# Altium PCB PCB.PcbDoc
Units mm, origin at the board's own origin, x right, y up, seen from the top; angles counter-clockwise.
Board outline 110 x 80 mm, 2 copper layers (Top Layer, Bottom Layer), stack 1.671 mm thick; 61 components, 33 nets, 262 pads, 10 vias.
Unrouted connection lines stored in the file: 79.
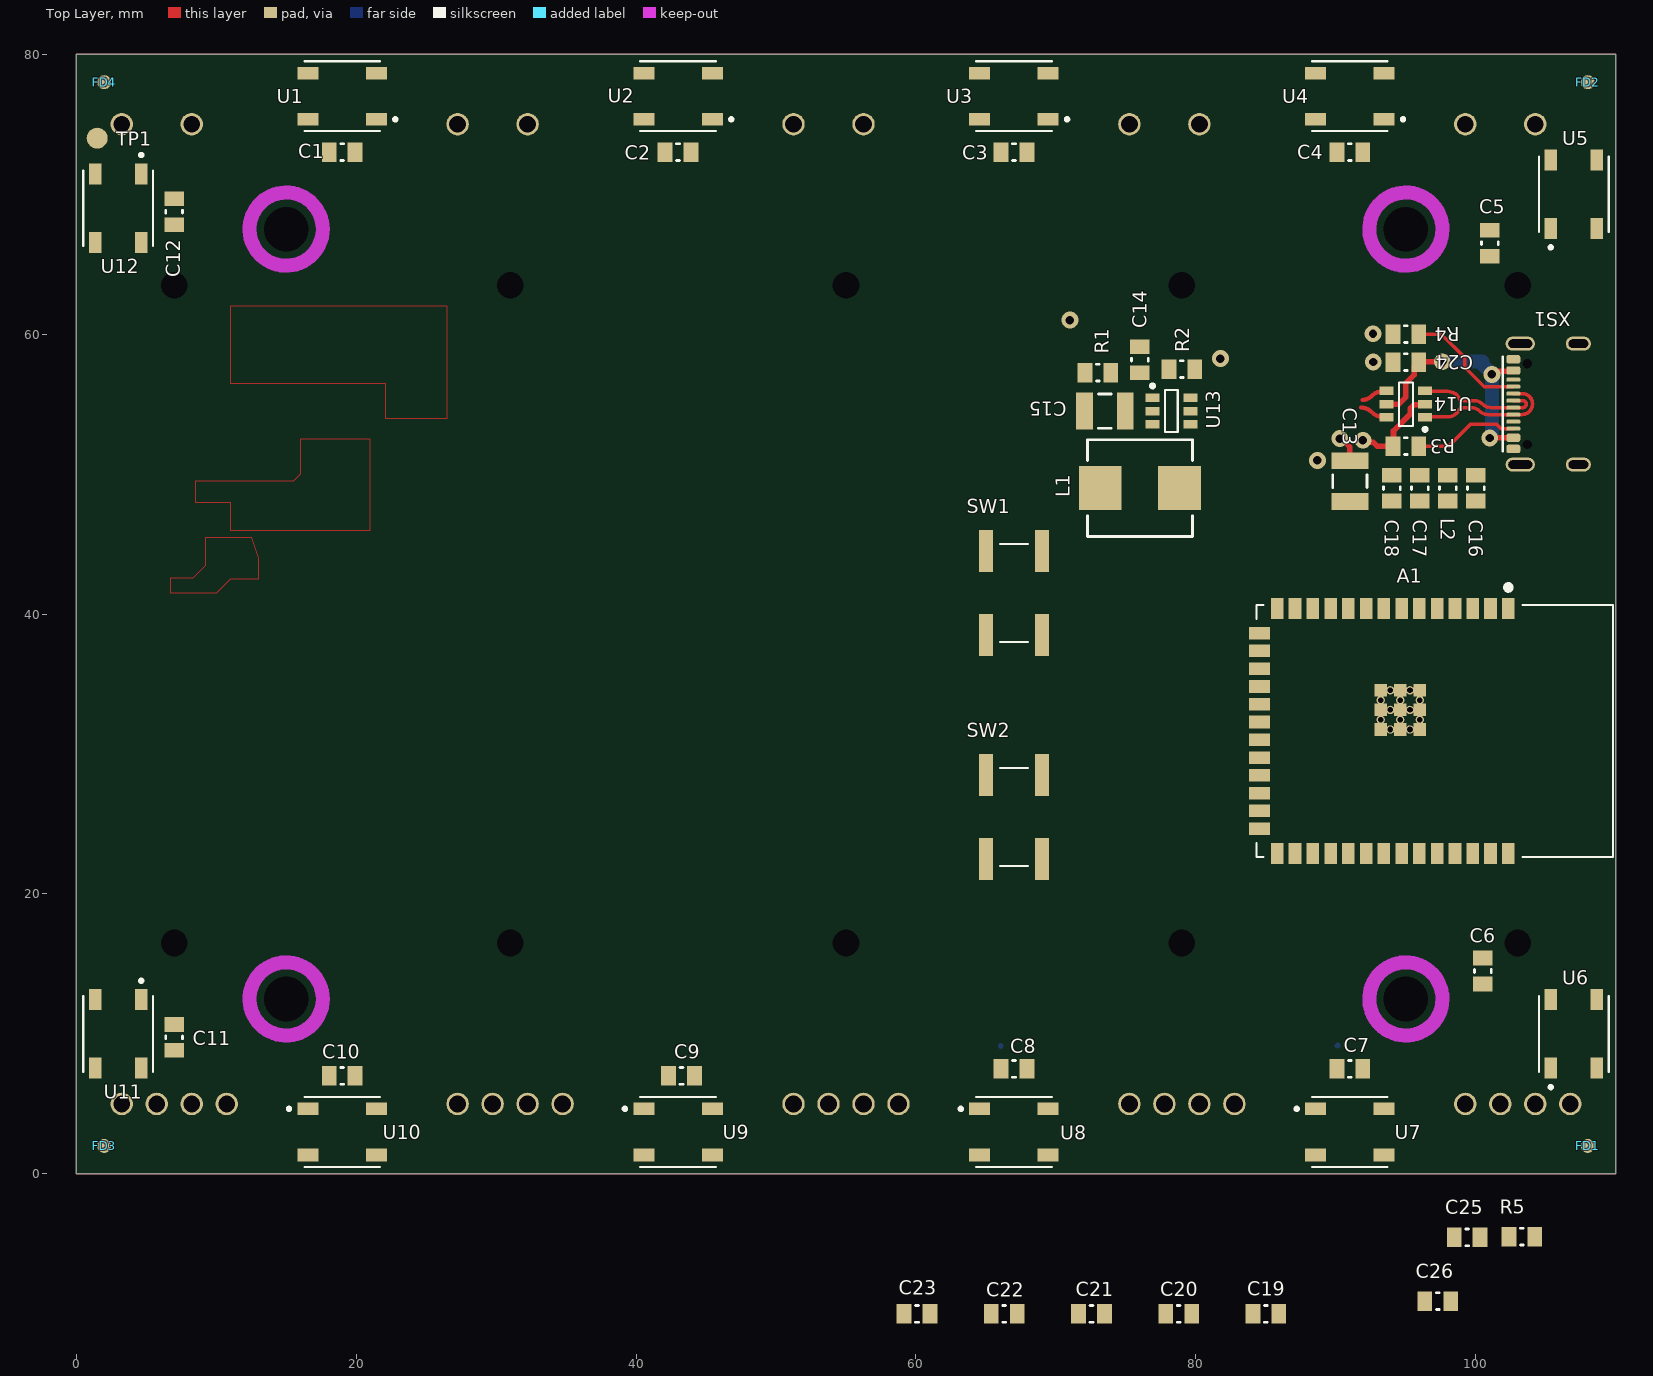
[diagram p0: Top Layer view]
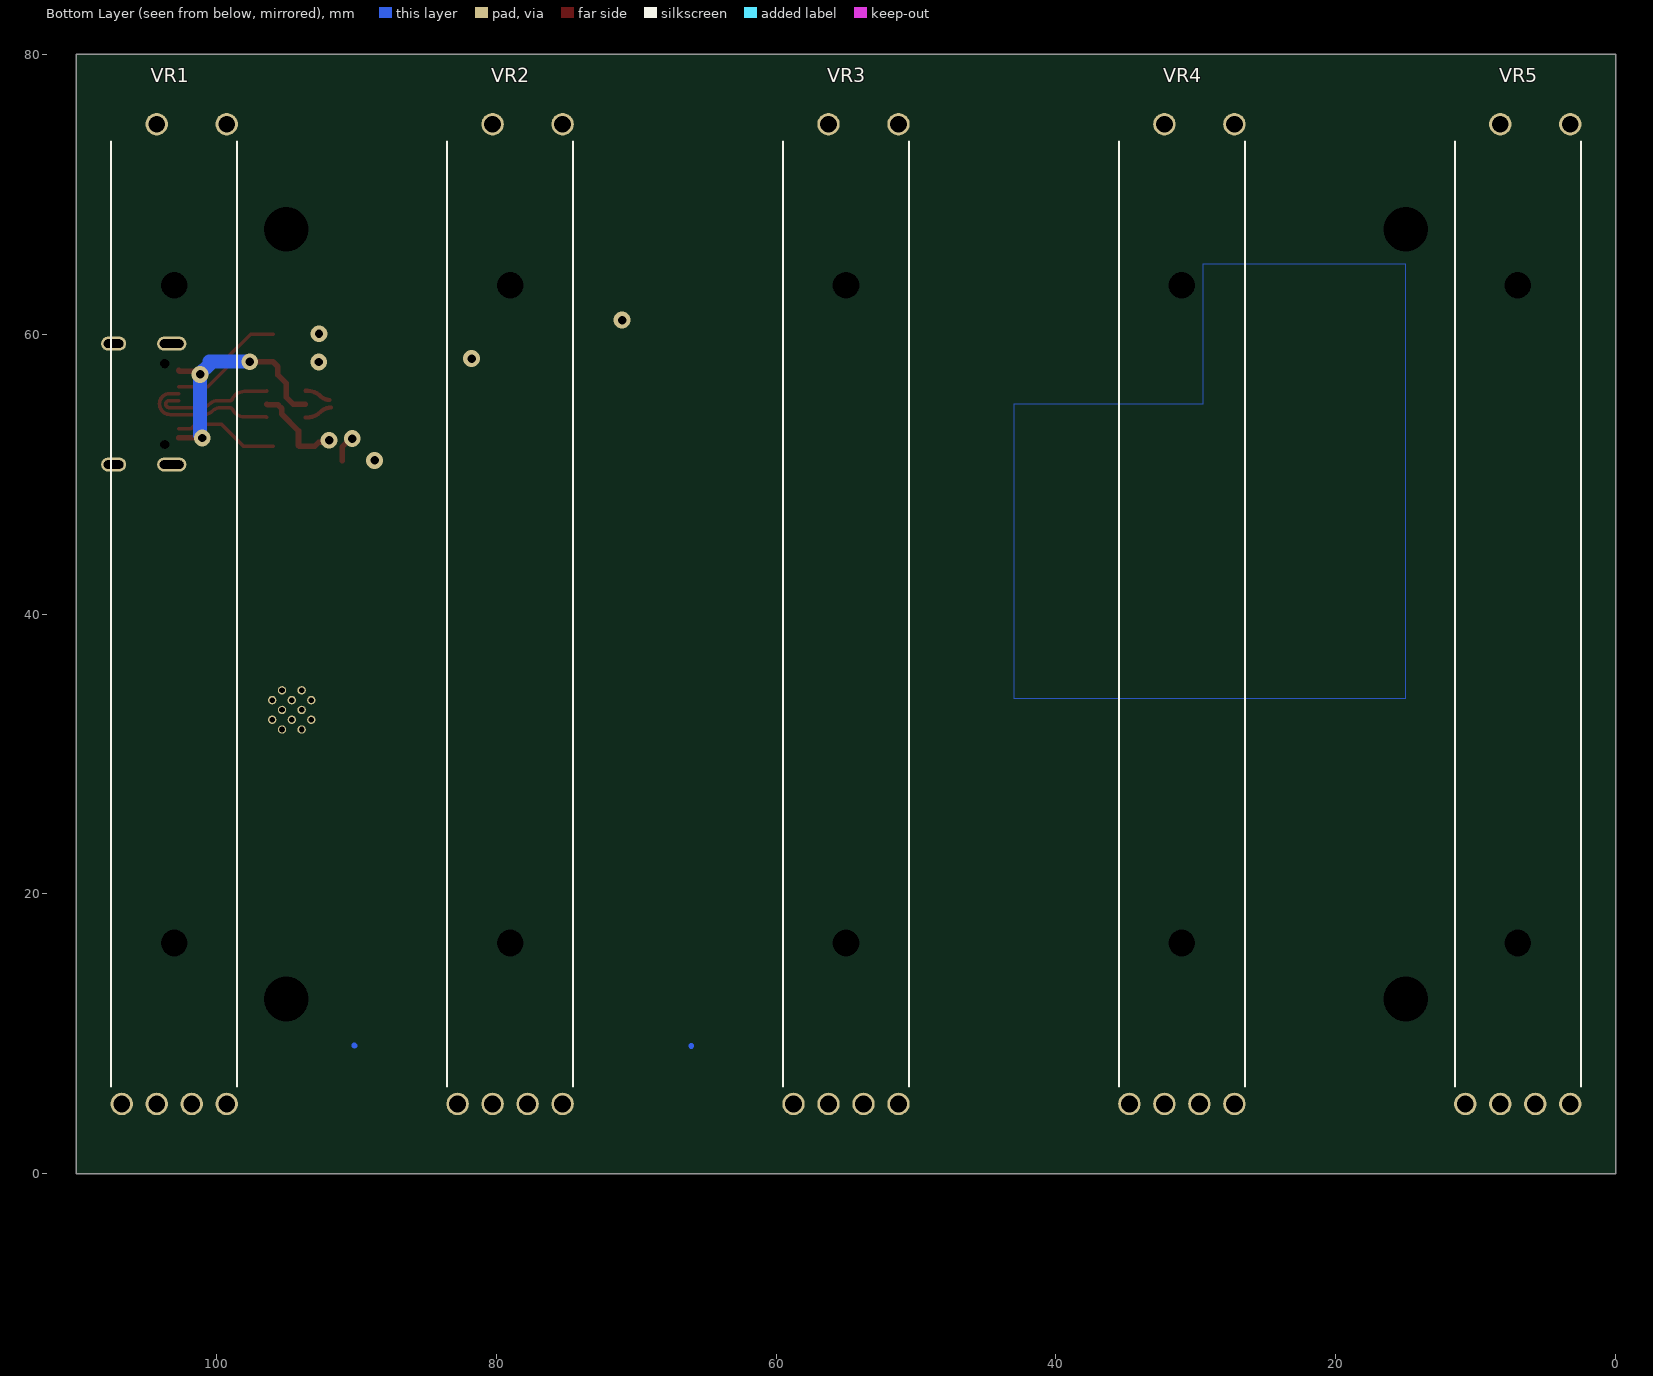
[diagram p1: Bottom Layer view, seen from below]

## Layer stack, top to bottom
Top Solder: solder mask 0.0102, Solder Resist, Dk 3.5
Top Layer: signal copper 0.0356
Dielectric 1: dielectric 1.6, FR-4, Dk 4.8
Bottom Layer: signal copper 0.0356
Bottom Solder: solder mask 0.0102, Solder Resist, Dk 3.5

## Board outline
0,0 0,80 110,80 110,0

## Design rules (kind name [scope] priority, off if disabled: settings)
BoardOutlineClearance [All] p1: gap=0.4 ignorepadtopadclearanceinfootprint=FALSE
Clearance Clearance_USB [(InDifferentialPairClass('All Differential Pairs')) vs InNet('GND')] p1: gap=0.15 ignorepadtopadclearanceinfootprint=FALSE except(0.8: SMDPad-Fill SMDPad-Poly SMDPad-Region; 1: Arc-Fill Arc-Poly Arc-Region Track-Fill Track-Poly Track-Region THPad-Fill THPad-Poly THPad-Region Via-Fill Via-Poly Via-Region Fill-Fill Fill-Poly Fill-Region Fill-Text Poly-Poly Poly-Region Poly-Text Region-Region Region-Text)
Clearance [All] p2: gap=0.15 ignorepadtopadclearanceinfootprint=FALSE except(0: Arc-Hole Track-Hole SMDPad-Hole THPad-Hole Via-Hole Fill-Hole Poly-Hole Region-Hole Text-Hole; 0.4: Arc-Fill Arc-Poly Arc-Region Track-Fill Track-Poly Track-Region SMDPad-Fill SMDPad-Poly SMDPad-Region THPad-Fill THPad-Poly THPad-Region Via-Fill Via-Poly Via-Region Fill-Fill Fill-Poly Fill-Region Poly-Poly Poly-Region Region-Region)
DiffPairsRouting [All] p1: maxlimit=0.3 minlimit=0.15 mostfreqgap=0.25 toplayer_minwidth=0.15 toplayer_maxwidth=0.3 toplayer_prefwidth=0.25 bottomlayer_minwidth=0.15 bottomlayer_maxwidth=0.3 bottomlayer_prefwidth=0.25 maxuncoupledlength=12.7
HoleSize [All] p1: absolutevalues=TRUE maxlimit=3.5 minlimit=0.3 maxpercent=80.000 minpercent=20.000
HoleToHoleClearance [All] p1: gap=0.2 allowstackedmicrovias=TRUE
MinimumSolderMaskSliver [All] p1: minsoldermaskwidth=0.01
PlaneClearance [All] p1: clearance=0.5
PlaneConnect [All] p1: planeconnectstyle=Relief reliefexpansion=0.5 reliefentries=4 reliefconductorwidth=0.25 reliefairgap=0.25
PolygonConnect PolygonConnect_PWR [InNet('GND') or InNet('5V')     or InNet('V_IN')] p1: thpad.connectstyle=Relief thpad.reliefconductorwidth=0.25 thpad.reliefentries=4 thpad.polygonreliefangle="90 Angle" thpad.airgapwidth=0.25 smdpad.connectstyle=Relief smdpad.reliefconductorwidth=0.25 smdpad.reliefentries=4 smdpad.polygonreliefangle="90 Angle" smdpad.airgapwidth=0.25 via.connectstyle=Direct via.reliefconductorwidth=0.254 via.reliefentries=4 via.polygonreliefangle="90 Angle" via.airgapwidth=0.254
PolygonConnect [All] p2: connectstyle=Relief reliefconductorwidth=0.254 reliefentries=4 polygonreliefangle="90 Angle" airgapwidth=0.25
RoutingVias [All] p1: holewidth=0.3 width=1.2 viastyle="Through Hole" minholewidth=0.3 minwidth=1.2 maxholewidth=0.8 maxwidth=2
SilkToSilkClearance [All] p1: silktosilkclearance=0.15
SilkToSolderMaskClearance [IsPad] p1: minsilkscreentomaskgap=0.15 clearancetoexposedcopper=TRUE
SolderMaskExpansion [All] p1: expansion=0.102 istentingtop=FALSE
Width [All] p1: maxlimit=1 minlimit=0.15 preferedwidth=0.25
22 further rules are at their usual default settings.

## Classes and differential pairs
differential pair D1: +D1_P -D1_N
differential pair D: +D_P -D_N

## Components (designator, comment, footprint, x,y, rotation, side; value= is the part's Value field where it differs from the comment)
A1 "ESP32-S3-WROOM-1" ESP32-S3-WROOM-1 102.32,40.4 r270 top
C1 "10n" C0805 19,73 r0 top
C2 "10n" C0805 43,73 r0 top
C3 "10n" C0805 67,73 r0 top
C4 "10n" C0805 91,73 r0 top
C5 "10n" C0805 101,66.5 r270 top
C6 "10n" C0805 100.5,14.5 r270 top
C7 "10n" C0805 91,7.5 r180 top
C8 "10n" C0805 67,7.5 r180 top
C9 "10n" C0805 43.25,7 r180 top
C10 "10n" C0805 19,7 r180 top
C11 "10n" C0805 7,9.75 r90 top
C12 "10n" C0805 7,68.75 r90 top
C13 "22u" C1210 91,49.5 r270 top
C14 "22p" C0805 76,58.175 r90 top
C15 "22u" C1210 73.5,54.5 r180 top
C16 "10n" C0805 100,49 r90 top
C17 "100n" C0805 96,49 r270 top
C18 "4.7u" C0805 94,49 r270 top
C19 "100n" C0805 85,-10 r180 top
C20 "100n" C0805 78.769,-10 r180 top
C21 "100n" C0805 72.537,-10 r180 top
C22 "100n" C0805 66.306,-10 r180 top
C23 "100n" C0805 60.075,-10 r180 top
C24 "100n" C0805 95,58 r0 top
C25 "100n" C0805 99.377,-4.526 r0 top
C26 "100n" C0805 97.285,-9.097 r0 top
FD1 "Fiducial" Fiducial 108,2 r0 top
FD2 "Fiducial" Fiducial 108,78 r0 top
FD3 "Fiducial" Fiducial 2,2 r0 top
FD4 "Fiducial" Fiducial 2,78 r0 top
L1 "4.7u" ASPI-0630LR-4R7 76,49 r180 top
L2 "" C0805 98,49 r270 top
R1 "267k" R0805 73,57.25 r180 top
R2 "59k" R0805 79,57.5 r180 top
R3 "5.1k" R0805 95,52 r0 top
R4 "5.1k" R0805 95,60 r0 top
R5 "10k" R0805 103.289,-4.481 r180 top
SW1 "KSC241JLFS" KSC241JLFS 67,41.5 r90 top
SW2 "KSC241JLFS" KSC241JLFS 67,25.5 r270 top
TP1 "Test Point" Test-Point 1.5,74 r0 top
U1 "WS2812B" WS2812B 19,77 r180 top
U2 "WS2812B" WS2812B 43,77 r180 top
U3 "WS2812B" WS2812B 67,77 r180 top
U4 "WS2812B" WS2812B 91,77 r180 top
U5 "WS2812B" WS2812B 107,70 r90 top
U6 "WS2812B" WS2812B 107,10 r90 top
U7 "WS2812B" WS2812B 91,3 r0 top
U8 "WS2812B" WS2812B 67,3 r0 top
U9 "WS2812B" WS2812B 43,3 r0 top
U10 "WS2812B" WS2812B 19,3 r0 top
U11 "WS2812B" WS2812B 3,10 r270 top
U12 "WS2812B" WS2812B 3,69 r270 top
U13 "MT3420C" SOT23-6-MT3420C 78.25,54.5 r0 top
U14 "USBLC6-2SC6" SOT23-6L-USBLC6-2SC6 95,55 r180 top
VR1 "10k" SC6080GH 103,40 r90 bottom locked
VR2 "10k" SC6080GH 79,40 r90 bottom locked
VR3 "10k" SC6080GH 55,40 r90 bottom locked
VR4 "10k" SC6080GH 31,40 r90 bottom locked
VR5 "10k" SC6080GH 7,40 r90 bottom locked
XS1 "TYPEC-304-ACP16" XUNPU_TYPEC-304-ACP16 105,55 r90 top

## Footprints (in the part's own frame and the unit in brackets; to place one, negate y for a bottom-side part, rotate by r counter-clockwise, add the part's x,y. Pads: shape width x height; smd on the part's side, far side on the other; paste and mask are expansions set on the pad)
ASPI-0630LR-4R7 [mm]
  rect 3.05x3.15 smd: 1(-2.825,0) 2(2.825,0)
  silkscreen extent -3.75,-3.45 3.75,3.45, body extent -3.72,-3.33 3.72,3.32, height 3.1
C0805 [mm] "Chip Capacitor, 2-Leads, Body 2,00x1,25mm, IPC Medium Density"
  rect 1.05x1.4 smd: 1(-0.925,0) 2(0.925,0)
  silkscreen extent -0.1,-0.6 0.1,0.6, body extent -1,-0.63 1,0.63, height 0.6
C1210 [mm] "Chip Capacitor, 2-Leads, Body 3,20x2,50mm, IPC Medium Density"
  rect 1.2x2.65 smd: 1(-1.45,0) 2(1.45,0)
  silkscreen extent -0.45,-1.22 0.45,1.22, body extent -1.6,-1.25 1.6,1.25, height 0.77
ESP32-S3-WROOM-1 [mm]
  rect 1.5x0.9 smd: 1(0,0) 2(0,-1.27) 3(0,-2.54) 4(0,-3.81) 5(0,-5.08) 6(0,-6.35) 7(0,-7.62) 8(0,-8.89) 9(0,-10.16) 10(0,-11.43) 11(0,-12.7) 12(0,-13.97) 13(0,-15.24) 14(0,-16.51) 27(17.5,-16.51) 28(17.5,-15.24) 29(17.5,-13.97) 30(17.5,-12.7) 31(17.5,-11.43) 32(17.5,-10.16) 33(17.5,-8.89) 34(17.5,-7.62) 35(17.5,-6.35) 36(17.5,-5.08) 37(17.5,-3.81) 38(17.5,-2.54) 39(17.5,-1.27) 40(17.5,0)
  rect 0.9x1.5 smd: 15(1.765,-17.76) 16(3.035,-17.76) 17(4.305,-17.76) 18(5.575,-17.76) 19(6.845,-17.76) 20(8.115,-17.76) 21(9.385,-17.76) 22(10.655,-17.76) 23(11.925,-17.76) 24(13.195,-17.76) 25(14.465,-17.76) 26(15.735,-17.76)
  rect 0.9x0.9 smd: 41(5.85,-7.72) 41(5.85,-9.12) 41(5.85,-6.32) 41(7.25,-9.12) 41(7.25,-7.72) 41(7.25,-6.32) 41(8.65,-9.12) 41(8.65,-7.72) 41(8.65,-6.32)
  round 0.6 hole 0.4: 41(5.85,-7.025) 41(5.85,-8.425) 41(6.55,-9.12) 41(6.55,-7.72) 41(6.55,-6.32) 41(7.25,-8.425) 41(7.25,-7.025) 41(7.95,-9.12) 41(7.95,-7.725) 41(7.95,-6.32) 41(8.65,-8.425) 41(8.65,-7.025)
  silkscreen extent -1.75,-18 17.75,7.49, body extent -0.25,-18.01 17.77,7.5, height 3.11
Fiducial [mm]
  round 1 smd paste-3 mask+0.5: 0(0,0)
KSC241JLFS [mm]
  rect 3x1 smd: 1(-3,2) 2(3,2) 3(3,-2) 4(-3,-2)
  silkscreen extent -3.5,-1 3.5,1, body extent -3.4,-3.15 3.4,3.15, height 3.5
R0805 [mm] "Chip Resistor, 2-Leads, Body 2,10x1,30mm, IPC Medium Density"
  rect 1.05x1.4 smd: 1(-0.925,0) 2(0.925,0)
  silkscreen extent -0.1,-0.6 0.1,0.6, body extent -1,-0.63 1,0.62, height 0.5
SC6080GH [mm]
  round 1.4 hole 1.9 unplated: 0(-23.5,0) 0(23.5,0)
  round 1.6 hole 1.2: 1(-35,1.25) 1'(-35,-3.75) 2(-35,3.75) 2'(-35,-1.25) 3(35,1.25) 3'(35,-3.75)
  silkscreen extent -33.75,-4.5 33.75,4.5, body extent -37.5,-4.5 37.5,4.5, height 22.2
SOT23-6-MT3420C [mm] "SOT23, 6-Leads, Body 2,90x2,80mm, Pitch 0,95mm, IPC Medium Density"
  rect 1x0.6 smd: 1(-1.35,0.95) 2(-1.35,0) 3(-1.35,-0.95) 4(1.35,-0.95) 5(1.35,0) 6(1.35,0.95)
  silkscreen extent -1.47,-1.5 0.45,1.92, body extent -1.5,-1.5 1.5,1.5, height 1.45
SOT23-6L-USBLC6-2SC6 [mm] "SOT23, 6-Leads, Body 2,93x2,80mm, Pitch 0,95mm, IPC Medium Density"
  rect 1x0.6 smd: 1(-1.375,0.95) 2(-1.375,0) 3(-1.375,-0.95) 4(1.375,-0.95) 5(1.375,0) 6(1.375,0.95)
  silkscreen extent -1.5,-1.55 0.5,1.92, body extent -1.5,-1.53 1.5,1.53, height 1.45
Test-Point [mm]
  round 1.5 smd: 0(0,0)
WS2812B [mm]
  rect 1.5x0.9 smd: 1(-2.45,1.65) 2(-2.45,-1.65) 3(2.45,-1.65) 4(2.45,1.65)
  silkscreen extent -3.9,-2.5 2.7,2.5, body extent -2.68,-2.47 2.68,2.47, height 1.7
XUNPU_TYPEC-304-ACP16 [mm]
  rrect50% 0.6x1 smd: A1(-3.2,2.325) A4(-2.4,2.325) B1(3.2,2.325) B4(2.4,2.325)
  rrect50% 0.27x1 smd: A5(-1.75,2.325) A6(-0.25,2.325) A7(0.75,2.325) A8(1.75,2.325) B5(1.25,2.325) B6(0.25,2.325) B7(-0.75,2.325) B8(-1.25,2.325)
  oval 1x2.1 hole 0.6 slot 1.7 at 90 deg: MH1(-4.32,1.825) MH2(4.32,1.825)
  oval 1x1.8 hole 0.6 slot 1.4 at 90 deg: MH3(-4.32,-2.325) MH4(4.32,-2.325)
  round 0 hole 0.65 unplated: MHNP1(-2.89,1.325) MHNP2(2.89,1.325)
  silkscreen extent -3.4,3.08 3.4,3.08, body extent -4.47,-4.95 4.48,2.8, height 3.27

## Part data
A1: "2.4 GHz Wi-Fi (802.11 b/g/n) and Bluetooth® 5 (LE) module", Manufacturer=espressif, Datasheet=https://www.espressif.com/sites/default/files/documentation/esp32-s3-wroom-1_wroom-1u_datasheet_en.pdf, P/N=ESP32-S3-WROOM-1
C1 C2 C3 C4 C5 C6 C7 C8 C9 C10 C11 C12 C13 C14 C15 C16 C17 C18 C19 C20 C21 C22 C23 C24 C25 C26: library part Cap, "CAPACITOR"
FD1 FD2 FD3 FD4: "Fiducial marker"
L1: library part Ind, "INDUCTOR"
L2: library part Ind, "Ferrite Bead", P/N=blm21pg221s
R1 R2 R3 R4 R5: library part Res, "RESISTOR"
SW1 SW2: "SWITCH TACTILE SPST-NO 50mA @ 32VDC", Manufacturer=C&K, Datasheet=https://www.ckswitches.com/media/1968/ksc2.pdf, P/N=KSC241JLFS
TP1: "Test point"
U1 U2 U3 U4 U5 U6 U7 U8 U9 U10 U11 U12: "LED RGB 800kHZ", Manufacturer=Worldsemi, Datasheet=https://cdn-shop.adafruit.com/datasheets/WS2812B.pdf, P/N=WS2812B
U13: "2A 2.3-6V Input 1.5MHz Synchronous Step-Down Converter", Manufacturer=Aerosemi, Datasheet=https://datasheet.lcsc.com/lcsc/1806041635_XI-AN-Aerosemi-Tech-MT3420C_C181741.pdf, P/N=MT3420C
U14: "TVS DIODE 5.25V 17V SOT23-6", Manufacturer=STMicroelectronics, Datasheet=https://www.st.com/content/ccc/resource/technical/document/datasheet/06/1d/48/9c/6c/20/4a/b2/CD00050750.pdf/files/CD00050750.pdf/jcr:content/translations/en.CD00050750.pdf, P/N=USBLC6-2SC6
VR1 VR2 VR3 VR4 VR5: library part SC6080GH, "Nominal Resistance: 10K / Rated Power: 0.25 (W) / Resistance Tolerance: ±20 (%) / Sliding Noise: Less Than 68m (V) / Resolution: 100 (%) / Zero Resistance: 2 (Ω) / Contact Resistance: 5 (Ω) / Insulation Resistance: 100 (MΩ) / Whole Length: Approx. 75mm/3.0in", P/N=SC6080GH
XS1: "USB Type-C Compatible 16-position Right Angle Receptacle", Manufacturer=XUNPU, Datasheet=https://datasheet.lcsc.com/lcsc/2008152133_XUNPU-TYPEC-304S-ACP16_C720630.pdf, P/N=TYPEC-304-ACP16

## Free pads (board coordinates)
  round 0 hole 3.2 unplated mask+3: 0(15,12.5) 0(15,67.5) 0(95,12.5) 0(95,67.5)

## Via types
v1: diameter 1.2, hole 0.6, Top Layer to Bottom Layer, tented both sides, 10 vias

## Nets (pads, with @x,y where several pads share a name; then routed paths per layer and width w, separated by ;. In a path a pad name is that pad's centre, name@x,y a point inside that pad or via, vN(x,y) a via of type N, cw(c..) or ccw(c..) an arc to the next point about the centre after c; other vN are vias at no path point)
3V3: A1.2 C14.2 C15.2 L1.2 R1.2 R5.1 VR1.1 VR2.1 VR3.1 VR4.1 VR5.1
  other v1: 71,61
5V: C1.2 C2.2 C3.2 C4.2 C5.2 C6.2 C7.2 C8.2 C9.2 C10.2 C11.2 C12.2 C13.2 C17.2 C18.2 L2.2 U1.1 U2.1 U3.1 U4.1 U5.1 U6.1 U7.1 U8.1 U9.1 U10.1 U11.1 U12.1 U13.1 U13.4 | length 0.1
  Bottom Layer w0.4: 66.048,9.142 66.071,9.164 ; 90.116,9.164 90.139,9.187
CASE: XS1.MH1 XS1.MH2 XS1.MH3 XS1.MH4
D1_N: A1.13 U14.6 | length 3.9
  Top Layer w0.3: U14.6 U14.6@93.483,54.05 ; 92.549,54.437 ccw(c93.483,55.371) U14.6@93.483,54.05 ; 92.549,54.437 ccw(c91.793,53.681) 91.793,54.75 cw(c91.793,53.681) 92.549,54.437 ; 92.549,54.437 ccw(c93.483,55.371) U14.6@93.483,54.05
D1_P: A1.14 U14.4 | length 3.6
  Top Layer w0.3: U14.4 U14.4@93.469,55.95 ; 92.549,55.569 cw(c93.469,54.648) U14.4@93.469,55.95 ; 92.549,55.569 cw(c91.9,56.218) 91.9,55.3 ccw(c91.9,56.218) 92.549,55.569 ; 92.549,55.569 cw(c93.469,54.648) U14.4@93.469,55.95
D_N: U14.1 XS1.A7 XS1.B7 | length 12.7
  Top Layer w0.25: U14.1 cw(c96.472,53.953) 96.472,54.09 98,54.09 ccw(c98,55) 98.817,54.599 cw(c99.041,54.489) 99.04,54.739 99.699,54.739 cw(c99.699,53.904) 100.289,54.494 ccw(c100.878,55.084) 100.878,54.25 XS1.B7 103.277,54.25 ; XS1.A7 103.33,55.75 ; 103.277,54.25 ccw(c103.277,55.026) 104.053,55.026 ; 103.277,54.25 ccw(c103.277,55.026) 104.053,55.026 ; 103.33,55.75 cw(c103.33,55.026) 104.053,55.026 ; 103.33,55.75 cw(c103.33,55.026) 103.332,55.75 cw(c103.33,55.026) 104.008,55.278 cw(c103.33,55.026) 104.053,55.026
D_P: U14.3 XS1.A6 XS1.B6 | length 9.6
  Top Layer w0.25: U14.3 ccw(c96.472,56.047) 96.472,55.91 98,55.91 cw(c98,55) 98.825,55.384 ccw(c99.052,55.489) 99.051,55.239 99.906,55.239 cw(c99.906,54.404) 100.496,54.994 ccw(c101.086,55.584) 101.086,54.75 XS1.A6 103.359,54.75 ; XS1.B6 103.358,55.25 ; 103.359,54.75 ccw(c103.359,55) 103.609,55 ; 103.359,54.75 ccw(c103.359,55) 103.609,55 ; 103.358,55.25 cw(c103.358,55) 103.609,55 ; 103.358,55.25 cw(c103.358,55) 103.609,55
EN: A1.3 C25.2 R5.2 SW1.4
GND: A1.1 A1.40 A1.41 C1.1 C2.1 C3.1 C4.1 C5.1 C6.1 C7.1 C8.1 C9.1 C10.1 C11.1 C12.1 C13.1 C15.1 C16.1 C17.1 C18.1 C19.2 C20.2 C21.2 C22.2 C23.2 C24.1 C25.1 C26.1 R2.1 R3.1 R4.1 SW1.1 SW2.2 U1.3 U2.3 U3.3 U4.3 U5.3 U6.3 U7.3 U8.3 U9.3 U10.3 U11.3 U12.3 U13.2 U14.2 VR1.3 VR2.3 VR3.3 VR4.3 VR5.3 XS1.A1 XS1.B1 | length 8.7
  Top Layer w0.4: v1(90.276,52.536) 90.402,52.536 91,51.938 C13.1 ; v1(91.929,52.42) 92.082,52.267 92.683,52.267 92.95,52 R3.1 94.115,52.04 94.115,53.09 95.315,54.291 95.315,54.672 95.585,54.942 96.317,54.942 U14.2
  other v1: 88.681,50.976 92.664,58.008 81.75,58.25 92.65,60.02
IO0: A1.27 C26.2 SW2.3
LEDS: U1.4
LEDS1: U1.2 U2.4
LEDS2: U2.2 U3.4
LEDS3: U3.2 U4.4
LEDS4: U4.2 U5.4
LEDS5: U5.2 U6.4
LEDS6: U6.2 U7.4
LEDS7: U7.2 U8.4
LEDS8: U8.2 U9.4
LEDS9: U9.2 U10.4
LEDS10: U10.2 U11.4
LEDS11: U11.2 U12.4
LEDS12: TP1.0 U12.2
NetC14_1: C14.1 R1.1 R2.2 U13.6
NetL1_1: L1.1 U13.3
NetR3_2: R3.2 XS1.A5 | length 7.5
  Top Layer w0.25: R3.2 98.051,52 99.594,53.544 101.506,53.544 101.8,53.25 XS1.A5
NetR4_2: R4.2 XS1.B5 | length 8.7
  Top Layer w0.25: R4.2 97.523,60 99.196,58.327 99.196,57.644 100.593,56.247 101.54,56.247 101.543,56.25 XS1.B5
POT1: C19.1 VR1.2
POT2: C20.1 VR2.2 | length 0.2
  Top Layer w0.4: VR2.2@82.588,5.162 VR2.2
POT3: C21.1 VR3.2 | length 0.2
  Top Layer w0.4: VR3.2@58.588,5.162 VR3.2
POT4: C22.1 VR4.2 | length 0.2
  Top Layer w0.4: VR4.2@34.588,5.162 VR4.2
POT5: C23.1 VR5.2
V_IN: C16.2 C24.2 L2.1 U14.5 XS1.A4 XS1.B4 | length 18.2
  Top Layer w0.4: U14.5 94.5,55 95,55.5 95,56.5 95.5,57 95.6,57.1 95.6,57.675 C24.2 95.952,58.027 v1(97.602,58.027) ; v1(100.988,52.581) 100.998,52.59 102.665,52.59 XS1.A4 ; v1(101.145,57.122) 101.361,57.122 101.575,57.336 102.611,57.336 XS1.B4
  Bottom Layer w1: v1(97.602,58.027) 100.478,58.027 100.478,57.843 101.145,57.176 101.145,52.791 100.988,52.635 v1(100.988,52.581)
pads on no net: A1.4 A1.5 A1.6 A1.7 A1.8 A1.9 A1.10 A1.11 A1.12 A1.15 A1.16 A1.17 A1.18 A1.19 A1.20 A1.21 A1.22 A1.23 A1.24 A1.25 A1.26 A1.28 A1.29 A1.30 A1.31 A1.32 A1.33 A1.34 A1.35 A1.36 A1.37 A1.38 A1.39 FD1.0 FD2.0 FD3.0 FD4.0 SW1.2 SW1.3 SW2.1 SW2.4 U13.5 VR1.0 VR1.1' VR1.2' VR1.3' VR2.0 VR2.1' VR2.2' VR2.3' VR3.0 VR3.1' VR3.2' VR3.3' VR4.0 VR4.1' VR4.2' VR4.3' VR5.0 VR5.1' VR5.2' VR5.3' XS1.A8 XS1.B8 XS1.MHNP1 XS1.MHNP2

## Polygon pours and split planes (outlines as drawn)
GND on Top Layer "NONET_L01_P003" (solid, remove dead copper, shelved, pour order 3): 110,80 0,80 0,0 110,0
V_IN on Top Layer "NONET_L01_P000" (solid, shelved, pour order 0): 12.5,45.5 13,44 13,42.5 11,42.5 10,41.5 6.75,41.5 6.75,42.609 8.359,42.609 9.25,43.5 9.25,45.5
3V3 on Top Layer "NONET_L01_P002" (solid, shelved, pour order 2): 11,62 11,56.5 22.075,56.5 22.075,54 26.5,54 26.5,62
5V on Top Layer "NONET_L01_P001" (solid, shelved, pour order 1): 8.5,48 11,48 11,46 21,46 21,52.5 16,52.5 16,50 15.5,49.5 8.5,49.5
GND on Bottom Layer "NONET_L02_P004" (solid, shelved, pour order 4): 15,34 15,65 29.5,65 29.5,55 43,55 43,34

## Keep-outs
Top Layer:
  lines w1: 17.615,12.454 cw(c15,12.5) 17.616,12.5 ; 17.615,67.454 cw(c15,67.5) 17.616,67.5 ; 97.615,12.454 cw(c95,12.5) 97.616,12.5 ; 97.615,67.454 cw(c95,67.5) 97.616,67.5

## Silkscreen, mask and mechanical layers (free items; w line width, h text height)
Board Shape:
  the board outline again, w0.1

## Text inside footprints (layer, text, board x,y; h text height)
XS1: Top 3D Body "PCB Edge" at 109.667,53.084 h0.5 r90